# Altium PCB 数粒机双倍珠子发射板2通道.PcbDoc
Units mm, origin at the board's own origin, x right, y up, seen from the top; angles counter-clockwise.
Board outline 152 x 52 mm, 4 copper layers (TopLayer, MidLayer1, MidLayer2, BottomLayer); 33 components, 37 nets, 88 pads, 0 vias.
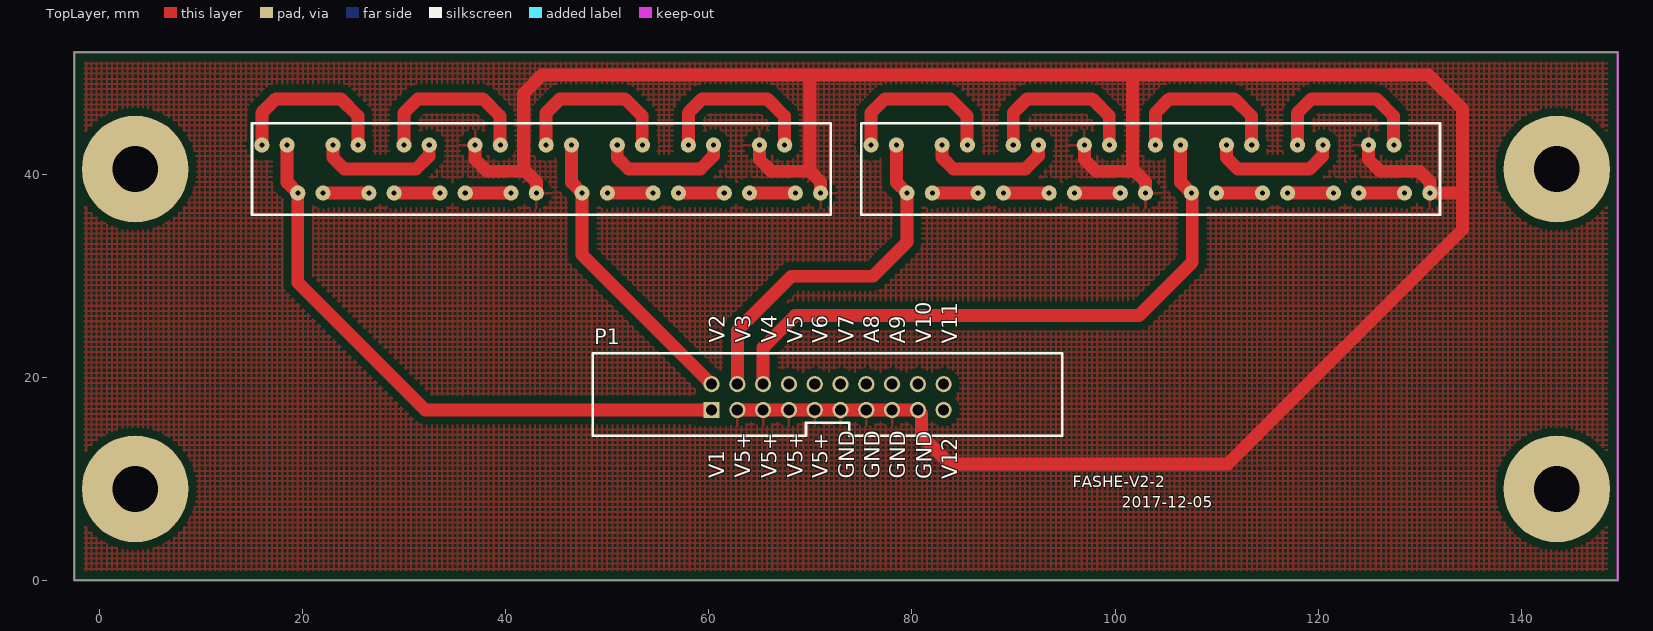
[diagram p0: TopLayer view]
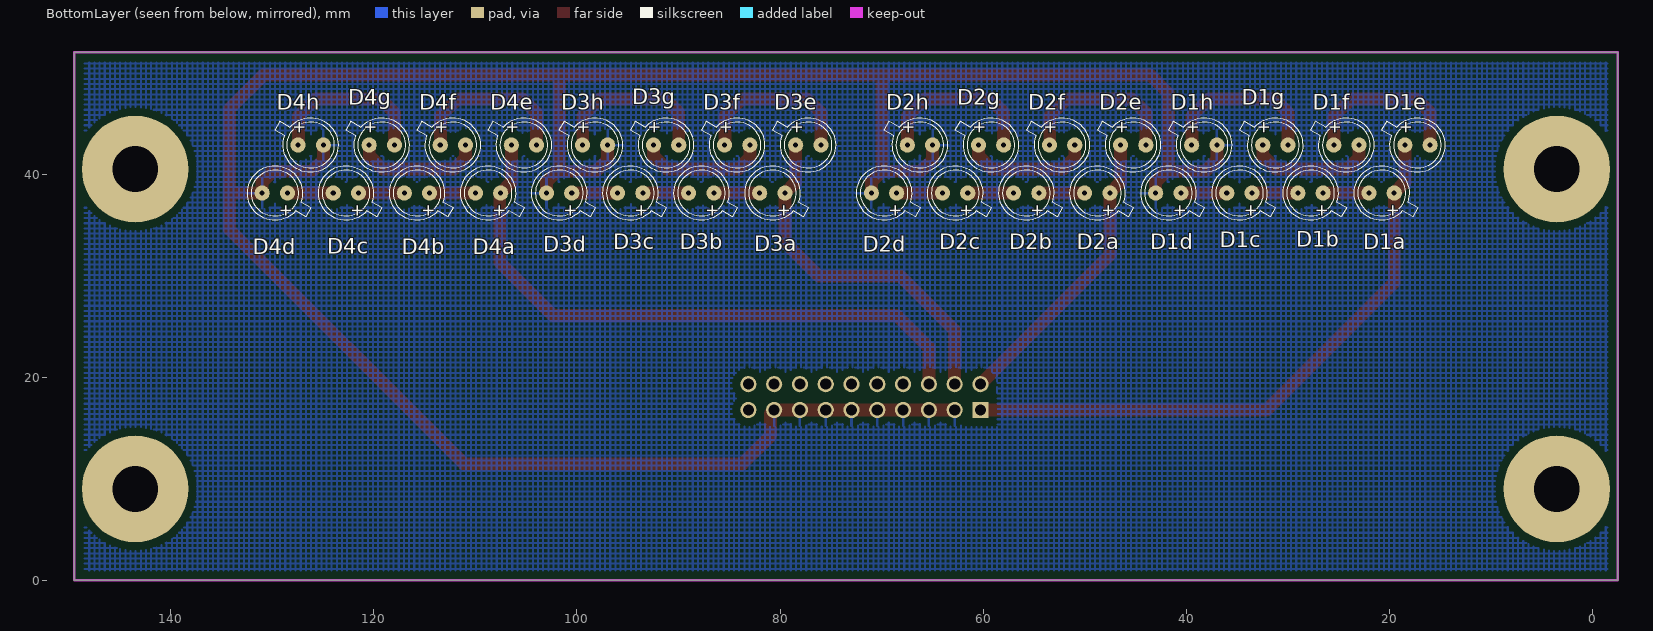
[diagram p1: BottomLayer view, seen from below]

## Layer stack, top to bottom
TopLayer: signal copper 0.0356
Dielectric: core 0.32, FR-4, Dk 4.8
MidLayer1: signal copper 0.0356
Dielectric: dielectric 0.32, FR-4, Dk 4.8
MidLayer2: signal copper 0.0356
Dielectric: dielectric 0.32, FR-4, Dk 4.8
BottomLayer: signal copper 0.0356

## Board outline
-2.5,0 149.5,0 149.5,52 -2.5,52

## Design rules (kind name [scope] priority, off if disabled: settings)
Clearance [All] p1: gap=0.762
PolygonConnect [All] p1: connectstyle=Relief reliefconductorwidth=0.254 reliefentries=4 polygonreliefangle="90 Angle"
RoutingLayers [All] p1: top layer_v5=TRUE mid layer 1_v5=FALSE mid layer 2_v5=FALSE bottom layer_v5=TRUE
RoutingVias RoutingVias_1 [All] p1: holewidth=1 width=2 viastyle="Through Hole" minholewidth=0.711 minwidth=1.27 maxholewidth=1 maxwidth=2
SilkscreenOverComponentPads [All] p1: minsilkscreentomaskgap=0.254
SolderMaskExpansion [All] p1: expansion=0.102
TestPointUsage [All] p1: valid=0 allowmultiple=FALSE
Testpoint [All] p1: side=3 testpointundercomponent=TRUE minsize=1.016 maxsize=2.54 preferedsize=1.524 minholesize=0.508 maxholesize=1.016 preferedholesize=0.813 testpointgrid=0.025 style=297 order=0-112345678
Width [All] p1: maxlimit=4.54 minlimit=0.2 preferedwidth=1
22 further rules are at their usual default settings.

## Components (designator, comment, footprint, x,y, rotation, side; value= is the part's Value field where it differs from the comment)
D1a "红外接收珠子" EL-1KL3 19.51,38.14 r0 bottom
D1b "红外接收珠子" EL-1KL3 26.51,38.14 r0 bottom
D1c "红外接收珠子" EL-1KL3 33.51,38.14 r0 bottom
D1d "红外接收珠子" EL-1KL3 40.51,38.14 r0 bottom
D1e "红外接收珠子" EL-1KL3 18.46,42.865 r180 bottom
D1f "红外接收珠子" EL-1KL3 25.46,42.865 r180 bottom
D1g "红外接收珠子" EL-1KL3 32.46,42.865 r180 bottom
D1h "红外接收珠子" EL-1KL3 39.46,42.865 r180 bottom
D2a "红外接收珠子" EL-1KL3 47.51,38.14 r0 bottom
D2b "红外接收珠子" EL-1KL3 54.51,38.14 r0 bottom
D2c "红外接收珠子" EL-1KL3 61.51,38.14 r0 bottom
D2d "红外接收珠子" EL-1KL3 68.51,38.14 r0 bottom
D2e "红外接收珠子" EL-1KL3 46.46,42.865 r180 bottom
D2f "红外接收珠子" EL-1KL3 53.46,42.865 r180 bottom
D2g "红外接收珠子" EL-1KL3 60.46,42.865 r180 bottom
D2h "红外接收珠子" EL-1KL3 67.46,42.865 r180 bottom
D3a "红外接收珠子" EL-1KL3 79.51,38.14 r0 bottom
D3b "红外接收珠子" EL-1KL3 86.51,38.14 r0 bottom
D3c "红外接收珠子" EL-1KL3 93.51,38.14 r0 bottom
D3d "红外接收珠子" EL-1KL3 100.51,38.14 r0 bottom
D3e "红外接收珠子" EL-1KL3 78.46,42.865 r180 bottom
D3f "红外接收珠子" EL-1KL3 85.46,42.865 r180 bottom
D3g "红外接收珠子" EL-1KL3 92.46,42.865 r180 bottom
D3h "红外接收珠子" EL-1KL3 99.46,42.865 r180 bottom
D4a "红外接收珠子" EL-1KL3 107.51,38.14 r0 bottom
D4b "红外接收珠子" EL-1KL3 114.51,38.14 r0 bottom
D4c "红外接收珠子" EL-1KL3 121.51,38.14 r0 bottom
D4d "红外接收珠子" EL-1KL3 128.51,38.14 r0 bottom
D4e "红外接收珠子" EL-1KL3 106.46,42.865 r180 bottom
D4f "红外接收珠子" EL-1KL3 113.46,42.865 r180 bottom
D4g "红外接收珠子" EL-1KL3 120.46,42.865 r180 bottom
D4h "红外接收珠子" EL-1KL3 127.46,42.865 r180 bottom
P1 "Header 10X2" niujiaocha20p 60.258,16.779 r0 top (schematic designator P)

## Footprints (in the part's own frame and the unit in brackets; to place one, negate y for a bottom-side part, rotate by r counter-clockwise, add the part's x,y. Pads: shape width x height; smd on the part's side, far side on the other; paste and mask are expansions set on the pad)
EL-1KL3 [mm]
  round 1.5 hole 0.5: 1(0,0) 2(2.49,0)
  silkscreen extent -2.31,-2.7 3.93,2.7
niujiaocha20p [mm]
  rect 1.6x1.6 hole 1.1: 1(0,0)
  round 1.6 hole 1.1: 2(0,2.54) 3(2.54,0) 4(2.54,2.54) 5(5.08,0) 6(5.08,2.54) 7(7.62,0) 8(7.62,2.54) 9(10.16,0) 10(10.16,2.54) 11(12.7,0) 12(12.7,2.54) 13(15.24,0) 14(15.24,2.54) 15(17.78,0) 16(17.78,2.54) 17(20.32,0) 18(20.32,2.54) 19(22.86,0) 20(22.86,2.54)
  silkscreen extent -11.68,-2.54 34.54,5.59

## Part data
D1a D1b D1c D1d D2a D2b D2c D2d D3a D3b D3c D3d D4a D4b D4c D4d: library part LED0, "PD15-"
D1e D1f D1g D1h D2e D2f D2g D2h D3e D3f D3g D3h D4e D4f D4g D4h: library part LED0, "EL-1KL3"
P1: "Header, 10-Pin, D"

## Free pads (board coordinates)
  round 10.5 hole 4.5 unplated: 1(3.5,40.5) 2(3.5,9) 3(143.5,9) 4(143.5,40.5)

## Nets (pads, with @x,y where several pads share a name; then routed paths per layer and width w, separated by ;. In a path a pad name is that pad's centre, name@x,y a point inside that pad or via, vN(x,y) a via of type N, cw(c..) or ccw(c..) an arc to the next point about the centre after c; other vN are vias at no path point)
GND: D1d.2 D1h.2 D2d.2 D2h.2 D3d.2 D3h.2 D4d.2 D4h.2 P1.3 P1.5 P1.7 P1.9 P1.11 P1.13 P1.15 P1.17 | length 264.1
  TopLayer w1.27: D1h.2 36.97,41.445 38.128,40.287 41.968,40.287 ; D1d.2 43,39.255 41.968,40.287 ; P1.3 P1.5 P1.7 P1.9 P1.11 P1.17 ; D2h.2 64.97,41.445 66.128,40.287 69.968,40.287 ; D2d.2 71,39.255 69.968,40.287 ; P1.13 P1.15 P1.17 ; D3h.2 96.97,41.445 98.128,40.287 101.968,40.287 ; 101.607,49.78 130.855,49.78 134.205,46.43 134.205,38.21 ; D3d.2 103,39.255 101.968,40.287 ; D4h.2 124.97,41.445 126.128,40.287 129.968,40.287 131,39.255 D4d.2 134.135,38.14 134.205,38.21 ; 41.968,40.287 41.74,40.515 41.74,47.95 43.57,49.78 69.99,49.78 ; 69.968,40.287 69.968,49.758 69.99,49.78 ; 69.99,49.78 101.725,49.78 101.725,40.53 101.968,40.287 ; P1.17 80.921,16.436 80.921,14.244 83.695,11.47 111.13,11.47 134.205,34.545 134.205,38.21
NetD1a_2: D1a.2 D1b.1 | length 4.5
  TopLayer w1.27: D1a.2 D1b.1
NetD1b_2: D1b.2 D1c.1 | length 4.5
  TopLayer w1.27: D1b.2 D1c.1
NetD1c_2: D1c.2 D1d.1 | length 4.5
  TopLayer w1.27: D1c.2 D1d.1
NetD1e_2: D1e.2 D1f.1 | length 16.8
  TopLayer w1.27: D1e.2 15.97,46.04 17.345,47.415 23.745,47.415 25.43,45.73 25.43,42.895 D1f.1
NetD1f_2: D1f.2 D1g.1 | length 12.8
  TopLayer w1.27: D1f.2 22.97,41.625 24.085,40.51 31.16,40.51 32.455,41.805 32.455,42.86 D1g.1
NetD1g_2: D1g.2 D1h.1 | length 16.7
  TopLayer w1.27: D1g.2 29.97,46.04 31.345,47.415 37.745,47.415 39.43,45.73 D1h.1@39.43,42.895
NetD2a_2: D2a.2 D2b.1 | length 4.5
  TopLayer w1.27: D2a.2 D2b.1
NetD2b_2: D2b.2 D2c.1 | length 4.5
  TopLayer w1.27: D2b.2 D2c.1
NetD2c_2: D2c.2 D2d.1 | length 4.5
  TopLayer w1.27: D2c.2 D2d.1
NetD2e_2: D2e.2 D2f.1 | length 16.7
  TopLayer w1.27: D2e.2 43.97,46.04 45.345,47.415 51.745,47.415 53.43,45.73 D2f.1@53.43,42.895
NetD2f_2: D2f.2 D2g.1 | length 12.8
  TopLayer w1.27: D2f.2 50.97,41.625 52.085,40.51 59.16,40.51 60.455,41.805 D2g.1@60.455,42.86
NetD2g_2: D2g.2 D2h.1 | length 16.7
  TopLayer w1.27: D2g.2 57.97,46.04 59.345,47.415 65.745,47.415 67.43,45.73 D2h.1@67.43,42.895
NetD3a_2: D3a.2 D3b.1 | length 4.5
  TopLayer w1.27: D3a.2 D3b.1
NetD3b_2: D3b.2 D3c.1 | length 4.5
  TopLayer w1.27: D3b.2 D3c.1
NetD3c_2: D3c.2 D3d.1 | length 4.5
  TopLayer w1.27: D3c.2 D3d.1
NetD3e_2: D3e.2 D3f.1 | length 16.7
  TopLayer w1.27: D3e.2 75.97,46.04 77.345,47.415 83.745,47.415 85.43,45.73 D3f.1@85.43,42.895
NetD3f_2: D3f.2 D3g.1 | length 12.8
  TopLayer w1.27: D3f.2 82.97,41.625 84.085,40.51 91.16,40.51 92.455,41.805 D3g.1@92.455,42.86
NetD3g_2: D3g.2 D3h.1 | length 16.7
  TopLayer w1.27: D3g.2 89.97,46.04 91.345,47.415 97.745,47.415 99.43,45.73 D3h.1@99.43,42.895
NetD4a_2: D4a.2 D4b.1 | length 4.5
  TopLayer w1.27: D4a.2 D4b.1
NetD4b_2: D4b.2 D4c.1 | length 4.5
  TopLayer w1.27: D4b.2 D4c.1
NetD4c_2: D4c.2 D4d.1 | length 4.5
  TopLayer w1.27: D4c.2 D4d.1
NetD4e_2: D4e.2 D4f.1 | length 16.7
  TopLayer w1.27: D4e.2 103.97,46.04 105.345,47.415 111.745,47.415 113.43,45.73 D4f.1@113.43,42.895
NetD4f_2: D4f.2 D4g.1 | length 12.8
  TopLayer w1.27: D4f.2 110.97,41.625 112.085,40.51 119.16,40.51 120.455,41.805 D4g.1@120.455,42.86
NetD4g_2: D4g.2 D4h.1 | length 16.7
  TopLayer w1.27: D4g.2 117.97,46.04 119.345,47.415 125.745,47.415 127.43,45.73 D4h.1@127.43,42.895
VOUT1: D1a.1 D1e.1 P1.1 | length 59.9
  TopLayer w1.27: D1e.1 18.46,39.19 D1a.1 19.51,29.335 32.066,16.779 P1.1
VOUT2: D2a.1 D2e.1 P1.2 | length 29.3
  TopLayer w1.27: D2e.1 46.46,39.19 D2a.1 47.51,32.067 P1.2
VOUT3: D3a.1 D3e.1 P1.4 | length 35.6
  TopLayer w1.27: P1.4 62.798,24.611 68.137,29.95 76.155,29.95 79.51,33.305 D3a.1 78.46,39.19 D3e.1
VOUT4: D4a.1 D4e.1 P1.6 | length 61.4
  TopLayer w1.27: P1.6 65.338,22.923 68.477,26.062 102.337,26.062 107.605,31.33 107.605,38.045 D4a.1 106.46,39.19 D4e.1
VOUT5: P1.8
VOUT6: P1.10
VOUT7: P1.12
VOUT8: P1.14
VOUT9: P1.16
VOUT10: P1.18
VOUT11: P1.20
VOUT12: P1.19

## Polygon pours and split planes (outlines as drawn)
GND on TopLayer "top" (hatched 90Degree grid 0.508 track 0.203, remove dead copper, pour order 2): -2.594,51.829 149.653,51.829 149.653,-0.171 -2.594,-0.171
GND on TopLayer "TopLayer-GND 2" (hatched 90Degree grid 0.508 track 0.508, remove dead copper, pour order 1002): 146.503,19.688
GND on BottomLayer "bottom" (hatched 90Degree grid 0.508 track 0.203, remove dead copper, pour order 4): -2.628,51.844 149.722,51.844 149.722,-0.156 -2.628,-0.156
GND on BottomLayer "BottomLayer-GND 3" (hatched 90Degree grid 0.508 track 0.508, remove dead copper, pour order 1007): -0.941,17.773
GND on BottomLayer "BottomLayer-GND 2" (hatched 90Degree grid 0.508 track 0.508, remove dead copper, pour order 1006): 298.159,33.642

## Keep-outs
KeepOutLayer:
  the board outline again, w0.254

## Silkscreen, mask and mechanical layers (free items; w line width, h text height)
TopOverlay:
  lines w0.254: 15,36 15,45 72,45 72,36 15,36 ; 75,36 75,45 132,45 132,36 75,36
  text "V2" at 61.569,23.418 h1.5 r90
  text "V3" at 64.104,23.418 h1.5 r90
  text "V4" at 66.689,23.418 h1.5 r90
  text "V5" at 69.219,23.363 h1.5 r90
  text "V7" at 74.284,23.363 h1.5 r90
  text "A8" at 76.784,23.363 h1.5 r90
  text "V6" at 71.694,23.333 h1.5 r90
  text "V10" at 81.904,23.333 h1.5 r90
  text "A9" at 79.314,23.308 h1.5 r90
  text "V11" at 84.434,23.308 h1.5 r90
  text "V5+" at 64.074,10.123 h1.5 r90
  text "V5+" at 69.219,10.093 h1.5 r90
  text "V1" at 61.514,10.068 h1.5 r90
  text "V5+" at 66.659,10.068 h1.5 r90
  text "V5+" at 71.724,10.038 h1.5 r90
  text "GND" at 74.309,10.008 h1.5 r90
  text "GND" at 76.814,10.008 h1.5 r90
  text "GND" at 79.344,9.983 h1.5 r90
  text "GND" at 81.929,9.953 h1.5 r90
  text "V12" at 84.434,9.953 h1.5 r90
  text "FASHE-V2-2" at 95.83,9.147 h1.1
  text "2017-12-05" at 100.675,7.145 h1.1

## Text inside footprints (layer, text, board x,y; h text height)
D1a: BottomOverlay "+" at 20.145,37.08 h1.2 r90
D1b: BottomOverlay "+" at 27.145,37.08 h1.2 r90
D1c: BottomOverlay "+" at 34.145,37.08 h1.2 r90
D1d: BottomOverlay "+" at 41.145,37.08 h1.2 r90
D1e: BottomOverlay "+" at 17.825,43.925 h1.2 r270
D1f: BottomOverlay "+" at 24.825,43.925 h1.2 r270
D1g: BottomOverlay "+" at 31.825,43.925 h1.2 r270
D1h: BottomOverlay "+" at 38.825,43.925 h1.2 r270
D2a: BottomOverlay "+" at 48.145,37.08 h1.2 r90
D2b: BottomOverlay "+" at 55.145,37.08 h1.2 r90
D2c: BottomOverlay "+" at 62.145,37.08 h1.2 r90
D2d: BottomOverlay "+" at 69.145,37.08 h1.2 r90
D2e: BottomOverlay "+" at 45.825,43.925 h1.2 r270
D2f: BottomOverlay "+" at 52.825,43.925 h1.2 r270
D2g: BottomOverlay "+" at 59.825,43.925 h1.2 r270
D2h: BottomOverlay "+" at 66.825,43.925 h1.2 r270
D3a: BottomOverlay "+" at 80.145,37.08 h1.2 r90
D3b: BottomOverlay "+" at 87.145,37.08 h1.2 r90
D3c: BottomOverlay "+" at 94.145,37.08 h1.2 r90
D3d: BottomOverlay "+" at 101.145,37.08 h1.2 r90
D3e: BottomOverlay "+" at 77.825,43.925 h1.2 r270
D3f: BottomOverlay "+" at 84.825,43.925 h1.2 r270
D3g: BottomOverlay "+" at 91.825,43.925 h1.2 r270
D3h: BottomOverlay "+" at 98.825,43.925 h1.2 r270
D4a: BottomOverlay "+" at 108.145,37.08 h1.2 r90
D4b: BottomOverlay "+" at 115.145,37.08 h1.2 r90
D4c: BottomOverlay "+" at 122.145,37.08 h1.2 r90
D4d: BottomOverlay "+" at 129.145,37.08 h1.2 r90
D4e: BottomOverlay "+" at 105.825,43.925 h1.2 r270
D4f: BottomOverlay "+" at 112.825,43.925 h1.2 r270
D4g: BottomOverlay "+" at 119.825,43.925 h1.2 r270
D4h: BottomOverlay "+" at 126.825,43.925 h1.2 r270